# EAGLE board pixelAdapter_l432-Panel-v3.0 (EAGLE 9.6.2), part 1 of 5
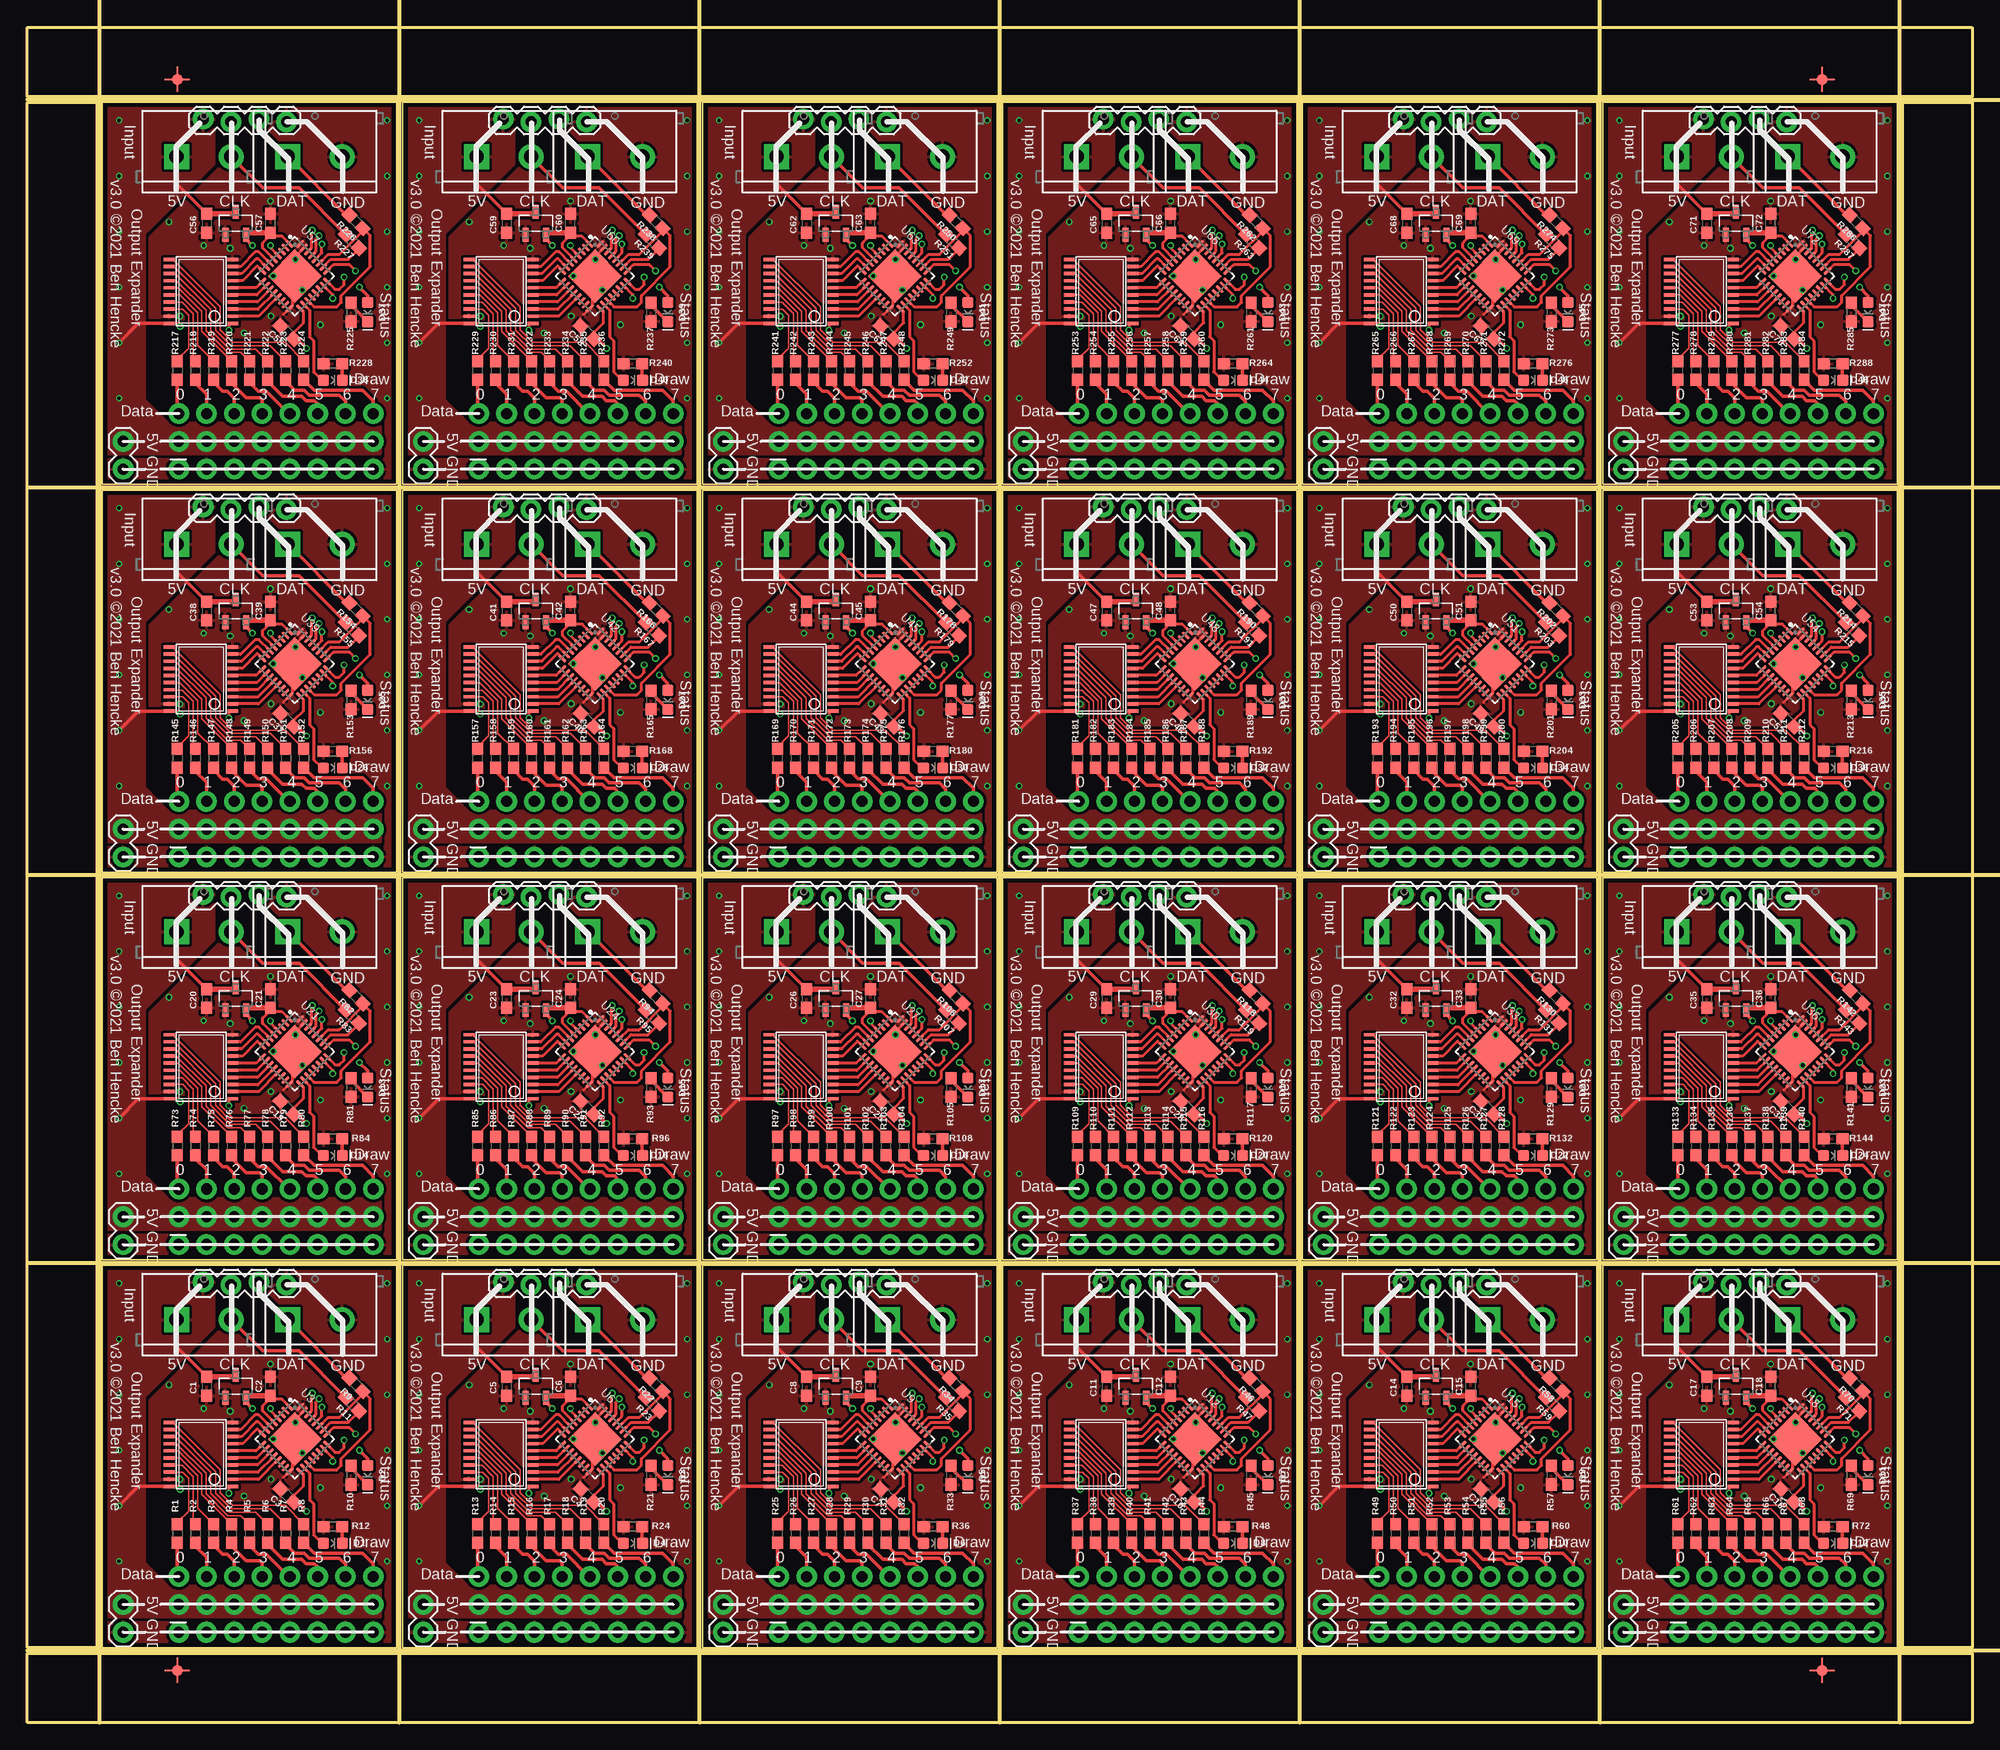
[diagram p0: board, top side]
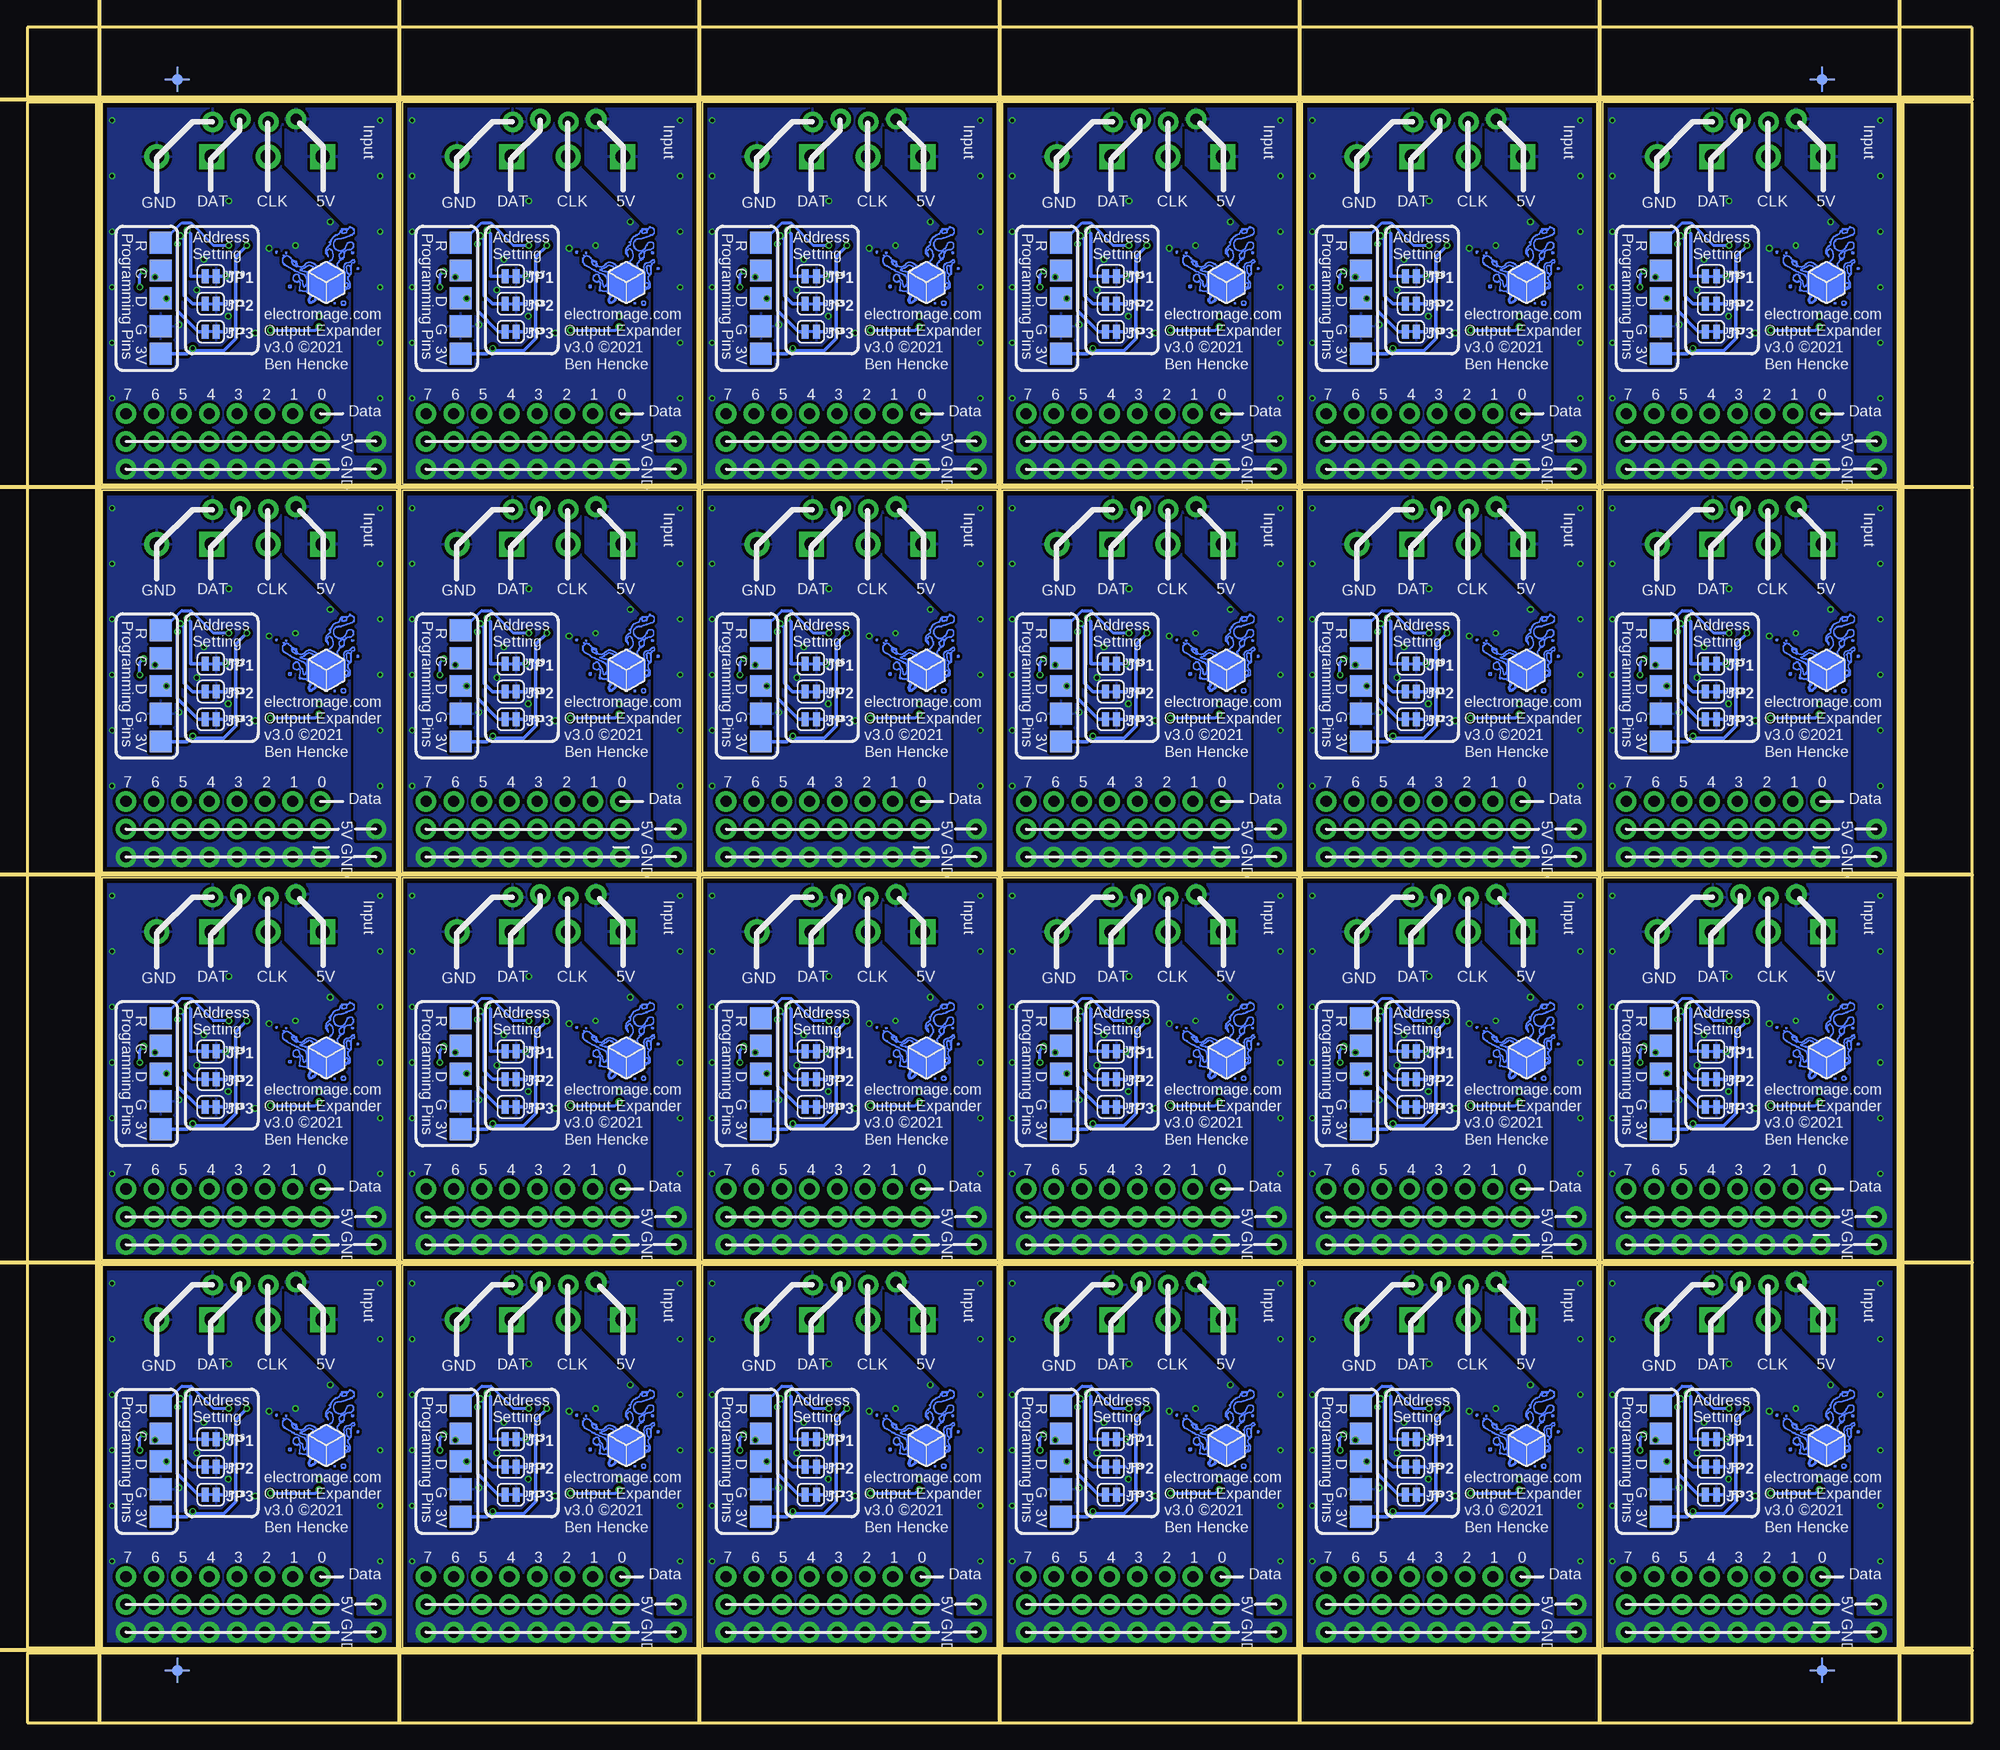
[diagram p1: board, bottom side, seen from below]

Size 177.8 x 154.94 mm. Coordinates in mm from the lower left corner, seen from the top.
Outline: 6.86,6.86 33.78,6.86 33.78,41.78 6.86,41.78 6.86,6.86
Outline: 34.29,6.86 61.21,6.86 61.21,41.78 34.29,41.78 34.29,6.86
Outline: 61.72,6.86 88.65,6.86 88.65,41.78 61.72,41.78 61.72,6.86
Outline: 89.15,6.86 116.08,6.86 116.08,41.78 89.15,41.78 89.15,6.86
Outline: 116.59,6.86 143.51,6.86 143.51,41.78 116.59,41.78 116.59,6.86
Outline: 144.02,6.86 170.94,6.86 170.94,41.78 144.02,41.78 144.02,6.86
Outline: 6.86,42.29 33.78,42.29 33.78,77.22 6.86,77.22 6.86,42.29
Outline: 34.29,42.29 61.21,42.29 61.21,77.22 34.29,77.22 34.29,42.29
Outline: 61.72,42.29 88.65,42.29 88.65,77.22 61.72,77.22 61.72,42.29
Outline: 89.15,42.29 116.08,42.29 116.08,77.22 89.15,77.22 89.15,42.29
Outline: 116.59,42.29 143.51,42.29 143.51,77.22 116.59,77.22 116.59,42.29
Outline: 144.02,42.29 170.94,42.29 170.94,77.22 144.02,77.22 144.02,42.29
Outline: 6.86,77.72 33.78,77.72 33.78,112.65 6.86,112.65 6.86,77.72
Outline: 34.29,77.72 61.21,77.72 61.21,112.65 34.29,112.65 34.29,77.72
Outline: 61.72,77.72 88.65,77.72 88.65,112.65 61.72,112.65 61.72,77.72
Outline: 89.15,77.72 116.08,77.72 116.08,112.65 89.15,112.65 89.15,77.72
Outline: 116.59,77.72 143.51,77.72 143.51,112.65 116.59,112.65 116.59,77.72
Outline: 144.02,77.72 170.94,77.72 170.94,112.65 144.02,112.65 144.02,77.72
Outline: 6.86,113.16 33.78,113.16 33.78,148.08 6.86,148.08 6.86,113.16
Outline: 34.29,113.16 61.21,113.16 61.21,148.08 34.29,148.08 34.29,113.16
Outline: 61.72,113.16 88.65,113.16 88.65,148.08 61.72,148.08 61.72,113.16
Outline: 89.15,113.16 116.08,113.16 116.08,148.08 89.15,148.08 89.15,113.16
Outline: 116.59,113.16 143.51,113.16 143.51,148.08 116.59,148.08 116.59,113.16
Outline: 144.02,113.16 170.94,113.16 170.94,148.08 144.02,148.08 144.02,113.16
Outline: 0,6.35 177.8,6.35 177.8,0 0,0 0,6.35
Outline: 171.45,148.08 177.8,148.08 177.8,6.86 171.45,6.86 171.45,148.08
Outline: 0,154.94 177.8,154.94 177.8,148.59 0,148.59 0,154.94
Outline: 0,148.08 6.35,148.08 6.35,6.86 0,6.86 0,148.08
Copper layers (1*16): Top 0.035559375mm / dielectric 1.6mm / Bottom 0.035559375mm
Design rules "oshpark-2layer-benmod *": minimum track width 6mil, minimum drill 10mil, track to track 6mil, track to pad 6mil, pad to pad 6mil, via to via 6mil, smd to smd 6mil, copper to edge 15mil, drill to drill 6mil, minimum pad ring 5mil, minimum via ring 5mil, stop-mask expansion 1mil, vias tented up to drill 20mil, thermal gap 10mil
Milling: 12 lines

## Footprints (pad centres in the part's own frame; a part is rotated, then mirrored left to right if it is on the bottom)
0603 = smd 1.1 x 1: 1 -0.85,0; 2 0.85,0
LED-0603 = smd 1 x 1: A -0.877,0; C 0.877,0
BENSFIDUCIAL-SMALL = smd 1 x 1: 1 0,0 | smd 0.152 x 0.762: P$1 0,0.762; P$2 0,-0.762 | smd 0.762 x 0.152: P$3 0.762,0; P$4 -0.762,0
1X08_NO_SILK = drill 1.016 pad 1.88: 1 0,0; 2 2.54,0; 3 5.08,0; 4 7.62,0; 5 10.16,0; 6 12.7,0; 7 15.24,0; 8 17.78,0
2X8-NOSILK = drill 1.016 pad 1.88: 1 0,0; 2 0,2.54; 3 2.54,0; 4 2.54,2.54; 5 5.08,0; 6 5.08,2.54; 7 7.62,0; 8 7.62,2.54; 9 10.16,0; 10 10.16,2.54; 11 12.7,0; 12 12.7,2.54; 13 15.24,0; 14 15.24,2.54; 15 17.78,0; 16 17.78,2.54
SCREWTERMINAL-5MM-2 = drill 1.3 pad 2.286 square: 1 0,0 | drill 1.3 pad 2.286: 2 5,0
1X04_LOCK = drill 1.016 pad 1.88: 1 0,0.127; 2 2.54,-0.127; 3 5.08,0.127; 4 7.62,-0.127
1X02 = drill 1.016 pad 1.88: 1 0,0; 2 2.54,0
SMT-JUMPER_2_NC_TRACE_SILK = smd 0.635 x 1.27: 1 -0.508,0; 2 0.508,0
TP20SQ = smd 2 x 2: TP 0,0
TSSOP20 = smd 0.305 x 0.991: 1 -2.925,-2.918; 2 -2.275,-2.918; 3 -1.625,-2.918; 4 -0.975,-2.918; 5 -0.325,-2.918; 6 0.325,-2.918; 7 0.975,-2.918; 8 1.625,-2.918; 9 2.275,-2.918; 10 2.925,-2.918; 11 2.925,2.918; 12 2.275,2.918; 13 1.625,2.918; 14 0.975,2.918; 15 0.325,2.918; 16 -0.325,2.918; 17 -0.975,2.918; 18 -1.625,2.918; 19 -2.275,2.918; 20 -2.925,2.918
SOT95P237X112-3N = smd 0.559 x 1.27: 1 -0.94,-1.041; 2 0.94,-1.041; 3 0,1.041
QFN50P500X500X60-33N = smd 0.86 x 0.25: 1 -2.435,1.75; 2 -2.435,1.25; 3 -2.435,0.75; 4 -2.435,0.25; 5 -2.435,-0.25; 6 -2.435,-0.75; 7 -2.435,-1.25; 8 -2.435,-1.75; 17 2.435,-1.75; 18 2.435,-1.25; 19 2.435,-0.75; 20 2.435,-0.25; 21 2.435,0.25; 22 2.435,0.75; 23 2.435,1.25; 24 2.435,1.75 | smd 0.25 x 0.86: 9 -1.75,-2.435; 10 -1.25,-2.435; 11 -0.75,-2.435; 12 -0.25,-2.435; 13 0.25,-2.435; 14 0.75,-2.435; 15 1.25,-2.435; 16 1.75,-2.435; 25 1.75,2.435; 26 1.25,2.435; 27 0.75,2.435; 28 0.25,2.435; 29 -0.25,2.435; 30 -0.75,2.435; 31 -1.25,2.435; 32 -1.75,2.435 | smd 3.45 x 3.45: 33 0,0

## Placement (x,y rotation side)
C1  4.7uF  [0603]  16.38,30.73 270 top
C2  4.7uF  [0603]  22.23,30.73 90 top
C3  0.1uF  [0603]  23.75,20.75 135 top
C4  0.1uF  [0603]  51.18,20.75 135 top
C5  4.7uF  [0603]  43.81,30.73 270 top
C6  4.7uF  [0603]  49.66,30.73 90 top
C7  0.1uF  [0603]  78.61,20.75 135 top
C8  4.7uF  [0603]  71.25,30.73 270 top
C9  4.7uF  [0603]  77.09,30.73 90 top
C10  0.1uF  [0603]  106.05,20.75 135 top
C11  4.7uF  [0603]  98.68,30.73 270 top
C12  4.7uF  [0603]  104.52,30.73 90 top
C13  0.1uF  [0603]  133.48,20.75 135 top
C14  4.7uF  [0603]  126.11,30.73 270 top
C15  4.7uF  [0603]  131.95,30.73 90 top
C16  0.1uF  [0603]  160.91,20.75 135 top
C17  4.7uF  [0603]  153.54,30.73 270 top
C18  4.7uF  [0603]  159.38,30.73 90 top
C19  0.1uF  [0603]  23.75,56.18 135 top
C20  4.7uF  [0603]  16.38,66.17 270 top
C21  4.7uF  [0603]  22.23,66.17 90 top
C22  0.1uF  [0603]  51.18,56.18 135 top
C23  4.7uF  [0603]  43.81,66.17 270 top
C24  4.7uF  [0603]  49.66,66.17 90 top
C25  0.1uF  [0603]  78.61,56.18 135 top
C26  4.7uF  [0603]  71.25,66.17 270 top
C27  4.7uF  [0603]  77.09,66.17 90 top
C28  0.1uF  [0603]  106.05,56.18 135 top
C29  4.7uF  [0603]  98.68,66.17 270 top
C30  4.7uF  [0603]  104.52,66.17 90 top
C31  0.1uF  [0603]  133.48,56.18 135 top
C32  4.7uF  [0603]  126.11,66.17 270 top
C33  4.7uF  [0603]  131.95,66.17 90 top
C34  0.1uF  [0603]  160.91,56.18 135 top
C35  4.7uF  [0603]  153.54,66.17 270 top
C36  4.7uF  [0603]  159.38,66.17 90 top
C37  0.1uF  [0603]  23.75,91.62 135 top
C38  4.7uF  [0603]  16.38,101.6 270 top
C39  4.7uF  [0603]  22.23,101.6 90 top
C40  0.1uF  [0603]  51.18,91.62 135 top
C41  4.7uF  [0603]  43.81,101.6 270 top
C42  4.7uF  [0603]  49.66,101.6 90 top
C43  0.1uF  [0603]  78.61,91.62 135 top
C44  4.7uF  [0603]  71.25,101.6 270 top
C45  4.7uF  [0603]  77.09,101.6 90 top
C46  0.1uF  [0603]  106.05,91.62 135 top
C47  4.7uF  [0603]  98.68,101.6 270 top
C48  4.7uF  [0603]  104.52,101.6 90 top
C49  0.1uF  [0603]  133.48,91.62 135 top
C50  4.7uF  [0603]  126.11,101.6 270 top
C51  4.7uF  [0603]  131.95,101.6 90 top
C52  0.1uF  [0603]  160.91,91.62 135 top
C53  4.7uF  [0603]  153.54,101.6 270 top
C54  4.7uF  [0603]  159.38,101.6 90 top
C55  0.1uF  [0603]  23.75,127.05 135 top
C56  4.7uF  [0603]  16.38,137.03 270 top
C57  4.7uF  [0603]  22.23,137.03 90 top
C58  0.1uF  [0603]  51.18,127.05 135 top
C59  4.7uF  [0603]  43.81,137.03 270 top
C60  4.7uF  [0603]  49.66,137.03 90 top
C61  0.1uF  [0603]  78.61,127.05 135 top
C62  4.7uF  [0603]  71.25,137.03 270 top
C63  4.7uF  [0603]  77.09,137.03 90 top
C64  0.1uF  [0603]  106.05,127.05 135 top
C65  4.7uF  [0603]  98.68,137.03 270 top
C66  4.7uF  [0603]  104.52,137.03 90 top
C67  0.1uF  [0603]  133.48,127.05 135 top
C68  4.7uF  [0603]  126.11,137.03 270 top
C69  4.7uF  [0603]  131.95,137.03 90 top
C70  0.1uF  [0603]  160.91,127.05 135 top
C71  4.7uF  [0603]  153.54,137.03 270 top
C72  4.7uF  [0603]  159.38,137.03 90 top
D1  GREEN  [LED-0603]  27.94,16.38 0 top
D2  ORANGE  [LED-0603]  31.12,22.61 270 top
D3  ORANGE  [LED-0603]  58.55,22.61 270 top
D4  GREEN  [LED-0603]  55.37,16.38 0 top
D5  ORANGE  [LED-0603]  85.98,22.61 270 top
D6  GREEN  [LED-0603]  82.8,16.38 0 top
D7  ORANGE  [LED-0603]  113.41,22.61 270 top
D8  GREEN  [LED-0603]  110.24,16.38 0 top
D9  ORANGE  [LED-0603]  140.84,22.61 270 top
D10  GREEN  [LED-0603]  137.67,16.38 0 top
D11  ORANGE  [LED-0603]  168.28,22.61 270 top
D12  GREEN  [LED-0603]  165.1,16.38 0 top
D13  ORANGE  [LED-0603]  31.12,58.04 270 top
D14  GREEN  [LED-0603]  27.94,51.82 0 top
D15  ORANGE  [LED-0603]  58.55,58.04 270 top
D16  GREEN  [LED-0603]  55.37,51.82 0 top
D17  ORANGE  [LED-0603]  85.98,58.04 270 top
D18  GREEN  [LED-0603]  82.8,51.82 0 top
D19  ORANGE  [LED-0603]  113.41,58.04 270 top
D20  GREEN  [LED-0603]  110.24,51.82 0 top
D21  ORANGE  [LED-0603]  140.84,58.04 270 top
D22  GREEN  [LED-0603]  137.67,51.82 0 top
D23  ORANGE  [LED-0603]  168.28,58.04 270 top
D24  GREEN  [LED-0603]  165.1,51.82 0 top
D25  ORANGE  [LED-0603]  31.12,93.47 270 top
D26  GREEN  [LED-0603]  27.94,87.25 0 top
D27  ORANGE  [LED-0603]  58.55,93.47 270 top
D28  GREEN  [LED-0603]  55.37,87.25 0 top
D29  ORANGE  [LED-0603]  85.98,93.47 270 top
D30  GREEN  [LED-0603]  82.8,87.25 0 top
D31  ORANGE  [LED-0603]  113.41,93.47 270 top
D32  GREEN  [LED-0603]  110.24,87.25 0 top
D33  ORANGE  [LED-0603]  140.84,93.47 270 top
D34  GREEN  [LED-0603]  137.67,87.25 0 top
D35  ORANGE  [LED-0603]  168.28,93.47 270 top
D36  GREEN  [LED-0603]  165.1,87.25 0 top
D37  ORANGE  [LED-0603]  31.12,128.91 270 top
D38  GREEN  [LED-0603]  27.94,122.68 0 top
D39  ORANGE  [LED-0603]  58.55,128.91 270 top
D40  GREEN  [LED-0603]  55.37,122.68 0 top
D41  ORANGE  [LED-0603]  85.98,128.91 270 top
D42  GREEN  [LED-0603]  82.8,122.68 0 top
D43  ORANGE  [LED-0603]  113.41,128.91 270 top
D44  GREEN  [LED-0603]  110.24,122.68 0 top
D45  ORANGE  [LED-0603]  140.84,128.91 270 top
D46  GREEN  [LED-0603]  137.67,122.68 0 top
D47  ORANGE  [LED-0603]  168.28,128.91 270 top
D48  GREEN  [LED-0603]  165.1,122.68 0 top
E$1  [BENSFIDUCIAL-SMALL]  13.72,150.18 0 top
E$2  [BENSFIDUCIAL-SMALL]  13.72,150.18 0 bottom
E$3  [BENSFIDUCIAL-SMALL]  164.08,150.18 0 top
E$4  [BENSFIDUCIAL-SMALL]  164.08,150.18 0 bottom
E$5  [BENSFIDUCIAL-SMALL]  13.72,4.76 0 top
E$6  [BENSFIDUCIAL-SMALL]  13.72,4.76 0 bottom
E$7  [BENSFIDUCIAL-SMALL]  164.08,4.76 0 top
E$8  [BENSFIDUCIAL-SMALL]  164.08,4.76 0 bottom
J1  [1X08_NO_SILK]  13.84,8.25 0 top
J2  [2X8-NOSILK]  13.84,10.79 0 top
J3  [SCREWTERMINAL-5MM-2]  13.64,36.83 0 top
J4  [SCREWTERMINAL-5MM-2]  23.8,36.83 0 top
J5  [1X04_LOCK]  23.7,40.13 180 top
J6  [1X02]  8.76,8.25 90 top
J7  [2X8-NOSILK]  41.27,10.79 0 top
J8  [SCREWTERMINAL-5MM-2]  41.07,36.83 0 top
J9  [SCREWTERMINAL-5MM-2]  51.23,36.83 0 top
J10  [1X04_LOCK]  51.13,40.13 180 top
J11  [1X08_NO_SILK]  41.27,8.25 0 top
J12  [1X02]  36.2,8.25 90 top
J13  [2X8-NOSILK]  68.71,10.79 0 top
J14  [SCREWTERMINAL-5MM-2]  68.5,36.83 0 top
J15  [SCREWTERMINAL-5MM-2]  78.66,36.83 0 top
J16  [1X04_LOCK]  78.56,40.13 180 top
J17  [1X08_NO_SILK]  68.71,8.25 0 top
J18  [1X02]  63.63,8.25 90 top
J19  [2X8-NOSILK]  96.14,10.79 0 top
J20  [SCREWTERMINAL-5MM-2]  95.93,36.83 0 top
J21  [SCREWTERMINAL-5MM-2]  106.09,36.83 0 top
J22  [1X04_LOCK]  105.99,40.13 180 top
J23  [1X08_NO_SILK]  96.14,8.25 0 top
J24  [1X02]  91.06,8.25 90 top
J25  [2X8-NOSILK]  123.57,10.79 0 top
J26  [SCREWTERMINAL-5MM-2]  123.36,36.83 0 top
J27  [SCREWTERMINAL-5MM-2]  133.52,36.83 0 top
J28  [1X04_LOCK]  133.42,40.13 180 top
J29  [1X08_NO_SILK]  123.57,8.25 0 top
J30  [1X02]  118.49,8.25 90 top
J31  [2X8-NOSILK]  151,10.79 0 top
J32  [SCREWTERMINAL-5MM-2]  150.8,36.83 0 top
J33  [SCREWTERMINAL-5MM-2]  160.96,36.83 0 top
J34  [1X04_LOCK]  160.86,40.13 180 top
J35  [1X08_NO_SILK]  151,8.25 0 top
J36  [1X02]  145.92,8.25 90 top
J37  [2X8-NOSILK]  13.84,46.23 0 top
J38  [SCREWTERMINAL-5MM-2]  13.64,72.26 0 top
J39  [SCREWTERMINAL-5MM-2]  23.8,72.26 0 top
J40  [1X04_LOCK]  23.7,75.56 180 top
J41  [1X08_NO_SILK]  13.84,43.69 0 top
J42  [1X02]  8.76,43.69 90 top
J43  [2X8-NOSILK]  41.27,46.23 0 top
J44  [SCREWTERMINAL-5MM-2]  41.07,72.26 0 top
J45  [SCREWTERMINAL-5MM-2]  51.23,72.26 0 top
J46  [1X04_LOCK]  51.13,75.56 180 top
J47  [1X08_NO_SILK]  41.27,43.69 0 top
J48  [1X02]  36.2,43.69 90 top
J49  [2X8-NOSILK]  68.71,46.23 0 top
J50  [SCREWTERMINAL-5MM-2]  68.5,72.26 0 top
J51  [SCREWTERMINAL-5MM-2]  78.66,72.26 0 top
J52  [1X04_LOCK]  78.56,75.56 180 top
J53  [1X08_NO_SILK]  68.71,43.69 0 top
J54  [1X02]  63.63,43.69 90 top
J55  [2X8-NOSILK]  96.14,46.23 0 top
J56  [SCREWTERMINAL-5MM-2]  95.93,72.26 0 top
J57  [SCREWTERMINAL-5MM-2]  106.09,72.26 0 top
J58  [1X04_LOCK]  105.99,75.56 180 top
J59  [1X08_NO_SILK]  96.14,43.69 0 top
J60  [1X02]  91.06,43.69 90 top
J61  [2X8-NOSILK]  123.57,46.23 0 top
J62  [SCREWTERMINAL-5MM-2]  123.36,72.26 0 top
J63  [SCREWTERMINAL-5MM-2]  133.52,72.26 0 top
J64  [1X04_LOCK]  133.42,75.56 180 top
J65  [1X08_NO_SILK]  123.57,43.69 0 top
J66  [1X02]  118.49,43.69 90 top
J67  [2X8-NOSILK]  151,46.23 0 top
J68  [SCREWTERMINAL-5MM-2]  150.8,72.26 0 top
J69  [SCREWTERMINAL-5MM-2]  160.96,72.26 0 top
J70  [1X04_LOCK]  160.86,75.56 180 top
J71  [1X08_NO_SILK]  151,43.69 0 top
J72  [1X02]  145.92,43.69 90 top
J73  [2X8-NOSILK]  13.84,81.66 0 top
J74  [SCREWTERMINAL-5MM-2]  13.64,107.7 0 top
J75  [SCREWTERMINAL-5MM-2]  23.8,107.7 0 top
J76  [1X04_LOCK]  23.7,111 180 top
J77  [1X08_NO_SILK]  13.84,79.12 0 top
J78  [1X02]  8.76,79.12 90 top
J79  [2X8-NOSILK]  41.27,81.66 0 top
J80  [SCREWTERMINAL-5MM-2]  41.07,107.7 0 top
J81  [SCREWTERMINAL-5MM-2]  51.23,107.7 0 top
J82  [1X04_LOCK]  51.13,111 180 top
J83  [1X08_NO_SILK]  41.27,79.12 0 top
J84  [1X02]  36.2,79.12 90 top
J85  [2X8-NOSILK]  68.71,81.66 0 top
J86  [SCREWTERMINAL-5MM-2]  68.5,107.7 0 top
J87  [SCREWTERMINAL-5MM-2]  78.66,107.7 0 top
J88  [1X04_LOCK]  78.56,111 180 top
J89  [1X08_NO_SILK]  68.71,79.12 0 top
J90  [1X02]  63.63,79.12 90 top
J91  [2X8-NOSILK]  96.14,81.66 0 top
J92  [SCREWTERMINAL-5MM-2]  95.93,107.7 0 top
J93  [SCREWTERMINAL-5MM-2]  106.09,107.7 0 top
J94  [1X04_LOCK]  105.99,111 180 top
J95  [1X08_NO_SILK]  96.14,79.12 0 top
J96  [1X02]  91.06,79.12 90 top
J97  [2X8-NOSILK]  123.57,81.66 0 top
J98  [SCREWTERMINAL-5MM-2]  123.36,107.7 0 top
J99  [SCREWTERMINAL-5MM-2]  133.52,107.7 0 top
J100  [1X04_LOCK]  133.42,111 180 top
J101  [1X08_NO_SILK]  123.57,79.12 0 top
J102  [1X02]  118.49,79.12 90 top
J103  [2X8-NOSILK]  151,81.66 0 top
J104  [SCREWTERMINAL-5MM-2]  150.8,107.7 0 top
J105  [SCREWTERMINAL-5MM-2]  160.96,107.7 0 top
J106  [1X04_LOCK]  160.86,111 180 top
J107  [1X08_NO_SILK]  151,79.12 0 top
J108  [1X02]  145.92,79.12 90 top
J109  [2X8-NOSILK]  13.84,117.09 0 top
J110  [SCREWTERMINAL-5MM-2]  13.64,143.13 0 top
J111  [SCREWTERMINAL-5MM-2]  23.8,143.13 0 top
J112  [1X04_LOCK]  23.7,146.43 180 top
J113  [1X08_NO_SILK]  13.84,114.55 0 top
J114  [1X02]  8.76,114.55 90 top
J115  [2X8-NOSILK]  41.27,117.09 0 top
J116  [SCREWTERMINAL-5MM-2]  41.07,143.13 0 top
J117  [SCREWTERMINAL-5MM-2]  51.23,143.13 0 top
J118  [1X04_LOCK]  51.13,146.43 180 top
J119  [1X08_NO_SILK]  41.27,114.55 0 top
J120  [1X02]  36.2,114.55 90 top
J121  [2X8-NOSILK]  68.71,117.09 0 top
J122  [SCREWTERMINAL-5MM-2]  68.5,143.13 0 top
J123  [SCREWTERMINAL-5MM-2]  78.66,143.13 0 top
J124  [1X04_LOCK]  78.56,146.43 180 top
J125  [1X08_NO_SILK]  68.71,114.55 0 top
J126  [1X02]  63.63,114.55 90 top
J127  [2X8-NOSILK]  96.14,117.09 0 top
J128  [SCREWTERMINAL-5MM-2]  95.93,143.13 0 top
J129  [SCREWTERMINAL-5MM-2]  106.09,143.13 0 top
J130  [1X04_LOCK]  105.99,146.43 180 top
J131  [1X08_NO_SILK]  96.14,114.55 0 top
J132  [1X02]  91.06,114.55 90 top
J133  [2X8-NOSILK]  123.57,117.09 0 top
J134  [SCREWTERMINAL-5MM-2]  123.36,143.13 0 top
J135  [SCREWTERMINAL-5MM-2]  133.52,143.13 0 top
J136  [1X04_LOCK]  133.42,146.43 180 top
J137  [1X08_NO_SILK]  123.57,114.55 0 top
J138  [1X02]  118.49,114.55 90 top
J139  [2X8-NOSILK]  151,117.09 0 top
J140  [SCREWTERMINAL-5MM-2]  150.8,143.13 0 top
J141  [SCREWTERMINAL-5MM-2]  160.96,143.13 0 top
J142  [1X04_LOCK]  160.86,146.43 180 top
J143  [1X08_NO_SILK]  151,114.55 0 top
J144  [1X02]  145.92,114.55 90 top
JP1  JUMPER-SMT_2_NC_TRACE_SILK  [SMT-JUMPER_2_NC_TRACE_SILK]  23.88,25.91 0 bottom
JP2  JUMPER-SMT_2_NC_TRACE_SILK  [SMT-JUMPER_2_NC_TRACE_SILK]  23.88,23.37 0 bottom
JP3  JUMPER-SMT_2_NC_TRACE_SILK  [SMT-JUMPER_2_NC_TRACE_SILK]  23.88,20.83 180 bottom
JP4  JUMPER-SMT_2_NC_TRACE_SILK  [SMT-JUMPER_2_NC_TRACE_SILK]  51.31,25.91 0 bottom
JP5  JUMPER-SMT_2_NC_TRACE_SILK  [SMT-JUMPER_2_NC_TRACE_SILK]  51.31,23.37 0 bottom
JP6  JUMPER-SMT_2_NC_TRACE_SILK  [SMT-JUMPER_2_NC_TRACE_SILK]  51.31,20.83 180 bottom
JP7  JUMPER-SMT_2_NC_TRACE_SILK  [SMT-JUMPER_2_NC_TRACE_SILK]  78.74,25.91 0 bottom
JP8  JUMPER-SMT_2_NC_TRACE_SILK  [SMT-JUMPER_2_NC_TRACE_SILK]  78.74,23.37 0 bottom
JP9  JUMPER-SMT_2_NC_TRACE_SILK  [SMT-JUMPER_2_NC_TRACE_SILK]  78.74,20.83 180 bottom
JP10  JUMPER-SMT_2_NC_TRACE_SILK  [SMT-JUMPER_2_NC_TRACE_SILK]  106.17,25.91 0 bottom
JP11  JUMPER-SMT_2_NC_TRACE_SILK  [SMT-JUMPER_2_NC_TRACE_SILK]  106.17,23.37 0 bottom
JP12  JUMPER-SMT_2_NC_TRACE_SILK  [SMT-JUMPER_2_NC_TRACE_SILK]  106.17,20.83 180 bottom
JP13  JUMPER-SMT_2_NC_TRACE_SILK  [SMT-JUMPER_2_NC_TRACE_SILK]  133.6,25.91 0 bottom
JP14  JUMPER-SMT_2_NC_TRACE_SILK  [SMT-JUMPER_2_NC_TRACE_SILK]  133.6,23.37 0 bottom
JP15  JUMPER-SMT_2_NC_TRACE_SILK  [SMT-JUMPER_2_NC_TRACE_SILK]  133.6,20.83 180 bottom
JP16  JUMPER-SMT_2_NC_TRACE_SILK  [SMT-JUMPER_2_NC_TRACE_SILK]  161.04,25.91 0 bottom
JP17  JUMPER-SMT_2_NC_TRACE_SILK  [SMT-JUMPER_2_NC_TRACE_SILK]  161.04,23.37 0 bottom
JP18  JUMPER-SMT_2_NC_TRACE_SILK  [SMT-JUMPER_2_NC_TRACE_SILK]  161.04,20.83 180 bottom
JP19  JUMPER-SMT_2_NC_TRACE_SILK  [SMT-JUMPER_2_NC_TRACE_SILK]  23.88,61.34 0 bottom
JP20  JUMPER-SMT_2_NC_TRACE_SILK  [SMT-JUMPER_2_NC_TRACE_SILK]  23.88,58.8 0 bottom
JP21  JUMPER-SMT_2_NC_TRACE_SILK  [SMT-JUMPER_2_NC_TRACE_SILK]  23.88,56.26 180 bottom
JP22  JUMPER-SMT_2_NC_TRACE_SILK  [SMT-JUMPER_2_NC_TRACE_SILK]  51.31,61.34 0 bottom
JP23  JUMPER-SMT_2_NC_TRACE_SILK  [SMT-JUMPER_2_NC_TRACE_SILK]  51.31,58.8 0 bottom
JP24  JUMPER-SMT_2_NC_TRACE_SILK  [SMT-JUMPER_2_NC_TRACE_SILK]  51.31,56.26 180 bottom
JP25  JUMPER-SMT_2_NC_TRACE_SILK  [SMT-JUMPER_2_NC_TRACE_SILK]  78.74,61.34 0 bottom
JP26  JUMPER-SMT_2_NC_TRACE_SILK  [SMT-JUMPER_2_NC_TRACE_SILK]  78.74,58.8 0 bottom
JP27  JUMPER-SMT_2_NC_TRACE_SILK  [SMT-JUMPER_2_NC_TRACE_SILK]  78.74,56.26 180 bottom
JP28  JUMPER-SMT_2_NC_TRACE_SILK  [SMT-JUMPER_2_NC_TRACE_SILK]  106.17,61.34 0 bottom
JP29  JUMPER-SMT_2_NC_TRACE_SILK  [SMT-JUMPER_2_NC_TRACE_SILK]  106.17,58.8 0 bottom
JP30  JUMPER-SMT_2_NC_TRACE_SILK  [SMT-JUMPER_2_NC_TRACE_SILK]  106.17,56.26 180 bottom
JP31  JUMPER-SMT_2_NC_TRACE_SILK  [SMT-JUMPER_2_NC_TRACE_SILK]  133.6,61.34 0 bottom
JP32  JUMPER-SMT_2_NC_TRACE_SILK  [SMT-JUMPER_2_NC_TRACE_SILK]  133.6,58.8 0 bottom
JP33  JUMPER-SMT_2_NC_TRACE_SILK  [SMT-JUMPER_2_NC_TRACE_SILK]  133.6,56.26 180 bottom
JP34  JUMPER-SMT_2_NC_TRACE_SILK  [SMT-JUMPER_2_NC_TRACE_SILK]  161.04,61.34 0 bottom
JP35  JUMPER-SMT_2_NC_TRACE_SILK  [SMT-JUMPER_2_NC_TRACE_SILK]  161.04,58.8 0 bottom
JP36  JUMPER-SMT_2_NC_TRACE_SILK  [SMT-JUMPER_2_NC_TRACE_SILK]  161.04,56.26 180 bottom
JP37  JUMPER-SMT_2_NC_TRACE_SILK  [SMT-JUMPER_2_NC_TRACE_SILK]  23.88,96.77 0 bottom
JP38  JUMPER-SMT_2_NC_TRACE_SILK  [SMT-JUMPER_2_NC_TRACE_SILK]  23.88,94.23 0 bottom
JP39  JUMPER-SMT_2_NC_TRACE_SILK  [SMT-JUMPER_2_NC_TRACE_SILK]  23.88,91.69 180 bottom
JP40  JUMPER-SMT_2_NC_TRACE_SILK  [SMT-JUMPER_2_NC_TRACE_SILK]  51.31,96.77 0 bottom
JP41  JUMPER-SMT_2_NC_TRACE_SILK  [SMT-JUMPER_2_NC_TRACE_SILK]  51.31,94.23 0 bottom
JP42  JUMPER-SMT_2_NC_TRACE_SILK  [SMT-JUMPER_2_NC_TRACE_SILK]  51.31,91.69 180 bottom
JP43  JUMPER-SMT_2_NC_TRACE_SILK  [SMT-JUMPER_2_NC_TRACE_SILK]  78.74,96.77 0 bottom
JP44  JUMPER-SMT_2_NC_TRACE_SILK  [SMT-JUMPER_2_NC_TRACE_SILK]  78.74,94.23 0 bottom
JP45  JUMPER-SMT_2_NC_TRACE_SILK  [SMT-JUMPER_2_NC_TRACE_SILK]  78.74,91.69 180 bottom
JP46  JUMPER-SMT_2_NC_TRACE_SILK  [SMT-JUMPER_2_NC_TRACE_SILK]  106.17,96.77 0 bottom
JP47  JUMPER-SMT_2_NC_TRACE_SILK  [SMT-JUMPER_2_NC_TRACE_SILK]  106.17,94.23 0 bottom
JP48  JUMPER-SMT_2_NC_TRACE_SILK  [SMT-JUMPER_2_NC_TRACE_SILK]  106.17,91.69 180 bottom
JP49  JUMPER-SMT_2_NC_TRACE_SILK  [SMT-JUMPER_2_NC_TRACE_SILK]  133.6,96.77 0 bottom
JP50  JUMPER-SMT_2_NC_TRACE_SILK  [SMT-JUMPER_2_NC_TRACE_SILK]  133.6,94.23 0 bottom
JP51  JUMPER-SMT_2_NC_TRACE_SILK  [SMT-JUMPER_2_NC_TRACE_SILK]  133.6,91.69 180 bottom
JP52  JUMPER-SMT_2_NC_TRACE_SILK  [SMT-JUMPER_2_NC_TRACE_SILK]  161.04,96.77 0 bottom
JP53  JUMPER-SMT_2_NC_TRACE_SILK  [SMT-JUMPER_2_NC_TRACE_SILK]  161.04,94.23 0 bottom
JP54  JUMPER-SMT_2_NC_TRACE_SILK  [SMT-JUMPER_2_NC_TRACE_SILK]  161.04,91.69 180 bottom
JP55  JUMPER-SMT_2_NC_TRACE_SILK  [SMT-JUMPER_2_NC_TRACE_SILK]  23.88,132.21 0 bottom
JP56  JUMPER-SMT_2_NC_TRACE_SILK  [SMT-JUMPER_2_NC_TRACE_SILK]  23.88,129.67 0 bottom
JP57  JUMPER-SMT_2_NC_TRACE_SILK  [SMT-JUMPER_2_NC_TRACE_SILK]  23.88,127.13 180 bottom
JP58  JUMPER-SMT_2_NC_TRACE_SILK  [SMT-JUMPER_2_NC_TRACE_SILK]  51.31,132.21 0 bottom
JP59  JUMPER-SMT_2_NC_TRACE_SILK  [SMT-JUMPER_2_NC_TRACE_SILK]  51.31,129.67 0 bottom
JP60  JUMPER-SMT_2_NC_TRACE_SILK  [SMT-JUMPER_2_NC_TRACE_SILK]  51.31,127.13 180 bottom
JP61  JUMPER-SMT_2_NC_TRACE_SILK  [SMT-JUMPER_2_NC_TRACE_SILK]  78.74,132.21 0 bottom
JP62  JUMPER-SMT_2_NC_TRACE_SILK  [SMT-JUMPER_2_NC_TRACE_SILK]  78.74,129.67 0 bottom
JP63  JUMPER-SMT_2_NC_TRACE_SILK  [SMT-JUMPER_2_NC_TRACE_SILK]  78.74,127.13 180 bottom
JP64  JUMPER-SMT_2_NC_TRACE_SILK  [SMT-JUMPER_2_NC_TRACE_SILK]  106.17,132.21 0 bottom
JP65  JUMPER-SMT_2_NC_TRACE_SILK  [SMT-JUMPER_2_NC_TRACE_SILK]  106.17,129.67 0 bottom
JP66  JUMPER-SMT_2_NC_TRACE_SILK  [SMT-JUMPER_2_NC_TRACE_SILK]  106.17,127.13 180 bottom
JP67  JUMPER-SMT_2_NC_TRACE_SILK  [SMT-JUMPER_2_NC_TRACE_SILK]  133.6,132.21 0 bottom
JP68  JUMPER-SMT_2_NC_TRACE_SILK  [SMT-JUMPER_2_NC_TRACE_SILK]  133.6,129.67 0 bottom
JP69  JUMPER-SMT_2_NC_TRACE_SILK  [SMT-JUMPER_2_NC_TRACE_SILK]  133.6,127.13 180 bottom
JP70  JUMPER-SMT_2_NC_TRACE_SILK  [SMT-JUMPER_2_NC_TRACE_SILK]  161.04,132.21 0 bottom
JP71  JUMPER-SMT_2_NC_TRACE_SILK  [SMT-JUMPER_2_NC_TRACE_SILK]  161.04,129.67 0 bottom
JP72  JUMPER-SMT_2_NC_TRACE_SILK  [SMT-JUMPER_2_NC_TRACE_SILK]  161.04,127.13 180 bottom
R1  100  [0603]  13.72,17.27 270 top
R2  100  [0603]  15.37,17.27 270 top
R3  100  [0603]  17.02,17.27 270 top
R4  100  [0603]  18.67,17.27 270 top
R5  100  [0603]  20.32,17.27 270 top
R6  100  [0603]  21.97,17.27 270 top
R7  100  [0603]  23.62,17.27 270 top
R8  100  [0603]  25.27,17.27 270 top
R9  100  [0603]  30.05,30.89 315 top
R10  100  [0603]  29.59,22.61 270 top
R11  100  [0603]  29.72,29.08 135 top
R12  100  [0603]  27.94,17.91 180 top
R13  100  [0603]  41.15,17.27 270 top
R14  100  [0603]  42.8,17.27 270 top
R15  100  [0603]  44.45,17.27 270 top
R16  100  [0603]  46.1,17.27 270 top
R17  100  [0603]  47.75,17.27 270 top
R18  100  [0603]  49.4,17.27 270 top
R19  100  [0603]  51.05,17.27 270 top
R20  100  [0603]  52.7,17.27 270 top
R21  100  [0603]  57.02,22.61 270 top
R22  100  [0603]  57.48,30.89 315 top
R23  100  [0603]  57.15,29.08 135 top
R24  100  [0603]  55.37,17.91 180 top
R25  100  [0603]  68.58,17.27 270 top
R26  100  [0603]  70.23,17.27 270 top
R27  100  [0603]  71.88,17.27 270 top
R28  100  [0603]  73.53,17.27 270 top
R29  100  [0603]  75.18,17.27 270 top
R30  100  [0603]  76.84,17.27 270 top
R31  100  [0603]  78.49,17.27 270 top
R32  100  [0603]  80.14,17.27 270 top
R33  100  [0603]  84.45,22.61 270 top
R34  100  [0603]  84.91,30.89 315 top
R35  100  [0603]  84.58,29.08 135 top
R36  100  [0603]  82.8,17.91 180 top
R37  100  [0603]  96.01,17.27 270 top
R38  100  [0603]  97.66,17.27 270 top
R39  100  [0603]  99.31,17.27 270 top
R40  100  [0603]  100.97,17.27 270 top
R41  100  [0603]  102.62,17.27 270 top
R42  100  [0603]  104.27,17.27 270 top
R43  100  [0603]  105.92,17.27 270 top
R44  100  [0603]  107.57,17.27 270 top
R45  100  [0603]  111.89,22.61 270 top
R46  100  [0603]  112.34,30.89 315 top
R47  100  [0603]  112.01,29.08 135 top
R48  100  [0603]  110.24,17.91 180 top
R49  100  [0603]  123.44,17.27 270 top
R50  100  [0603]  125.09,17.27 270 top
R51  100  [0603]  126.75,17.27 270 top
R52  100  [0603]  128.4,17.27 270 top
R53  100  [0603]  130.05,17.27 270 top
R54  100  [0603]  131.7,17.27 270 top
R55  100  [0603]  133.35,17.27 270 top
R56  100  [0603]  135,17.27 270 top
R57  100  [0603]  139.32,22.61 270 top
R58  100  [0603]  139.78,30.89 315 top
R59  100  [0603]  139.45,29.08 135 top
R60  100  [0603]  137.67,17.91 180 top
R61  100  [0603]  150.88,17.27 270 top
R62  100  [0603]  152.53,17.27 270 top
R63  100  [0603]  154.18,17.27 270 top
R64  100  [0603]  155.83,17.27 270 top
R65  100  [0603]  157.48,17.27 270 top
R66  100  [0603]  159.13,17.27 270 top
R67  100  [0603]  160.78,17.27 270 top
R68  100  [0603]  162.43,17.27 270 top
R69  100  [0603]  166.75,22.61 270 top
R70  100  [0603]  167.21,30.89 315 top
R71  100  [0603]  166.88,29.08 135 top
R72  100  [0603]  165.1,17.91 180 top
R73  100  [0603]  13.72,52.7 270 top
R74  100  [0603]  15.37,52.7 270 top
R75  100  [0603]  17.02,52.7 270 top
R76  100  [0603]  18.67,52.7 270 top
R77  100  [0603]  20.32,52.7 270 top
R78  100  [0603]  21.97,52.7 270 top
R79  100  [0603]  23.62,52.7 270 top
R80  100  [0603]  25.27,52.7 270 top
R81  100  [0603]  29.59,58.04 270 top
R82  100  [0603]  30.05,66.32 315 top
R83  100  [0603]  29.72,64.52 135 top
R84  100  [0603]  27.94,53.34 180 top
R85  100  [0603]  41.15,52.7 270 top
R86  100  [0603]  42.8,52.7 270 top
R87  100  [0603]  44.45,52.7 270 top
R88  100  [0603]  46.1,52.7 270 top
R89  100  [0603]  47.75,52.7 270 top
R90  100  [0603]  49.4,52.7 270 top
R91  100  [0603]  51.05,52.7 270 top
R92  100  [0603]  52.7,52.7 270 top
R93  100  [0603]  57.02,58.04 270 top
R94  100  [0603]  57.48,66.32 315 top
R95  100  [0603]  57.15,64.52 135 top
R96  100  [0603]  55.37,53.34 180 top
R97  100  [0603]  68.58,52.7 270 top
R98  100  [0603]  70.23,52.7 270 top
R99  100  [0603]  71.88,52.7 270 top
R100  100  [0603]  73.53,52.7 270 top
R101  100  [0603]  75.18,52.7 270 top
R102  100  [0603]  76.84,52.7 270 top
R103  100  [0603]  78.49,52.7 270 top
R104  100  [0603]  80.14,52.7 270 top
R105  100  [0603]  84.45,58.04 270 top
R106  100  [0603]  84.91,66.32 315 top
R107  100  [0603]  84.58,64.52 135 top
R108  100  [0603]  82.8,53.34 180 top
R109  100  [0603]  96.01,52.7 270 top
R110  100  [0603]  97.66,52.7 270 top
R111  100  [0603]  99.31,52.7 270 top
R112  100  [0603]  100.97,52.7 270 top
R113  100  [0603]  102.62,52.7 270 top
R114  100  [0603]  104.27,52.7 270 top
R115  100  [0603]  105.92,52.7 270 top
R116  100  [0603]  107.57,52.7 270 top
R117  100  [0603]  111.89,58.04 270 top
R118  100  [0603]  112.34,66.32 315 top
R119  100  [0603]  112.01,64.52 135 top
R120  100  [0603]  110.24,53.34 180 top
R121  100  [0603]  123.44,52.7 270 top
R122  100  [0603]  125.09,52.7 270 top
R123  100  [0603]  126.75,52.7 270 top
R124  100  [0603]  128.4,52.7 270 top
R125  100  [0603]  130.05,52.7 270 top
R126  100  [0603]  131.7,52.7 270 top
R127  100  [0603]  133.35,52.7 270 top
R128  100  [0603]  135,52.7 270 top
R129  100  [0603]  139.32,58.04 270 top
R130  100  [0603]  139.78,66.32 315 top
R131  100  [0603]  139.45,64.52 135 top
R132  100  [0603]  137.67,53.34 180 top
R133  100  [0603]  150.88,52.7 270 top
R134  100  [0603]  152.53,52.7 270 top
R135  100  [0603]  154.18,52.7 270 top
R136  100  [0603]  155.83,52.7 270 top
R137  100  [0603]  157.48,52.7 270 top
R138  100  [0603]  159.13,52.7 270 top
R139  100  [0603]  160.78,52.7 270 top
R140  100  [0603]  162.43,52.7 270 top
R141  100  [0603]  166.75,58.04 270 top
R142  100  [0603]  167.21,66.32 315 top
R143  100  [0603]  166.88,64.52 135 top
R144  100  [0603]  165.1,53.34 180 top
R145  100  [0603]  13.72,88.14 270 top
R146  100  [0603]  15.37,88.14 270 top
R147  100  [0603]  17.02,88.14 270 top
R148  100  [0603]  18.67,88.14 270 top
R149  100  [0603]  20.32,88.14 270 top
R150  100  [0603]  21.97,88.14 270 top
R151  100  [0603]  23.62,88.14 270 top
R152  100  [0603]  25.27,88.14 270 top
R153  100  [0603]  29.59,93.47 270 top
R154  100  [0603]  30.05,101.75 315 top
R155  100  [0603]  29.72,99.95 135 top
R156  100  [0603]  27.94,88.77 180 top
R157  100  [0603]  41.15,88.14 270 top
R158  100  [0603]  42.8,88.14 270 top
R159  100  [0603]  44.45,88.14 270 top
R160  100  [0603]  46.1,88.14 270 top
R161  100  [0603]  47.75,88.14 270 top
R162  100  [0603]  49.4,88.14 270 top
R163  100  [0603]  51.05,88.14 270 top
R164  100  [0603]  52.7,88.14 270 top
R165  100  [0603]  57.02,93.47 270 top
R166  100  [0603]  57.48,101.75 315 top
R167  100  [0603]  57.15,99.95 135 top
R168  100  [0603]  55.37,88.77 180 top
R169  100  [0603]  68.58,88.14 270 top
R170  100  [0603]  70.23,88.14 270 top
R171  100  [0603]  71.88,88.14 270 top
R172  100  [0603]  73.53,88.14 270 top
R173  100  [0603]  75.18,88.14 270 top
R174  100  [0603]  76.84,88.14 270 top
R175  100  [0603]  78.49,88.14 270 top
R176  100  [0603]  80.14,88.14 270 top
R177  100  [0603]  84.45,93.47 270 top
R178  100  [0603]  84.91,101.75 315 top
R179  100  [0603]  84.58,99.95 135 top
R180  100  [0603]  82.8,88.77 180 top
R181  100  [0603]  96.01,88.14 270 top
R182  100  [0603]  97.66,88.14 270 top
R183  100  [0603]  99.31,88.14 270 top
R184  100  [0603]  100.97,88.14 270 top
R185  100  [0603]  102.62,88.14 270 top
R186  100  [0603]  104.27,88.14 270 top
R187  100  [0603]  105.92,88.14 270 top
R188  100  [0603]  107.57,88.14 270 top
R189  100  [0603]  111.89,93.47 270 top
R190  100  [0603]  112.34,101.75 315 top
R191  100  [0603]  112.01,99.95 135 top
R192  100  [0603]  110.24,88.77 180 top
R193  100  [0603]  123.44,88.14 270 top
R194  100  [0603]  125.09,88.14 270 top
R195  100  [0603]  126.75,88.14 270 top
R196  100  [0603]  128.4,88.14 270 top
R197  100  [0603]  130.05,88.14 270 top
R198  100  [0603]  131.7,88.14 270 top
R199  100  [0603]  133.35,88.14 270 top
R200  100  [0603]  135,88.14 270 top
R201  100  [0603]  139.32,93.47 270 top
R202  100  [0603]  139.78,101.75 315 top
R203  100  [0603]  139.45,99.95 135 top
R204  100  [0603]  137.67,88.77 180 top
R205  100  [0603]  150.88,88.14 270 top
R206  100  [0603]  152.53,88.14 270 top
R207  100  [0603]  154.18,88.14 270 top
R208  100  [0603]  155.83,88.14 270 top
R209  100  [0603]  157.48,88.14 270 top
R210  100  [0603]  159.13,88.14 270 top
R211  100  [0603]  160.78,88.14 270 top
R212  100  [0603]  162.43,88.14 270 top
R213  100  [0603]  166.75,93.47 270 top
R214  100  [0603]  167.21,101.75 315 top
R215  100  [0603]  166.88,99.95 135 top
R216  100  [0603]  165.1,88.77 180 top
R217  100  [0603]  13.72,123.57 270 top
R218  100  [0603]  15.37,123.57 270 top
R219  100  [0603]  17.02,123.57 270 top
R220  100  [0603]  18.67,123.57 270 top
R221  100  [0603]  20.32,123.57 270 top
R222  100  [0603]  21.97,123.57 270 top
R223  100  [0603]  23.62,123.57 270 top
R224  100  [0603]  25.27,123.57 270 top
R225  100  [0603]  29.59,128.91 270 top
R226  100  [0603]  30.05,137.19 315 top
R227  100  [0603]  29.72,135.38 135 top
R228  100  [0603]  27.94,124.21 180 top
R229  100  [0603]  41.15,123.57 270 top
R230  100  [0603]  42.8,123.57 270 top
R231  100  [0603]  44.45,123.57 270 top
R232  100  [0603]  46.1,123.57 270 top
R233  100  [0603]  47.75,123.57 270 top
R234  100  [0603]  49.4,123.57 270 top
R235  100  [0603]  51.05,123.57 270 top
R236  100  [0603]  52.7,123.57 270 top
R237  100  [0603]  57.02,128.91 270 top
R238  100  [0603]  57.48,137.19 315 top
R239  100  [0603]  57.15,135.38 135 top
R240  100  [0603]  55.37,124.21 180 top
R241  100  [0603]  68.58,123.57 270 top
R242  100  [0603]  70.23,123.57 270 top
R243  100  [0603]  71.88,123.57 270 top
R244  100  [0603]  73.53,123.57 270 top
R245  100  [0603]  75.18,123.57 270 top
R246  100  [0603]  76.84,123.57 270 top
R247  100  [0603]  78.49,123.57 270 top
R248  100  [0603]  80.14,123.57 270 top
R249  100  [0603]  84.45,128.91 270 top
R250  100  [0603]  84.91,137.19 315 top
R251  100  [0603]  84.58,135.38 135 top
R252  100  [0603]  82.8,124.21 180 top
R253  100  [0603]  96.01,123.57 270 top
R254  100  [0603]  97.66,123.57 270 top
R255  100  [0603]  99.31,123.57 270 top
R256  100  [0603]  100.97,123.57 270 top
R257  100  [0603]  102.62,123.57 270 top
R258  100  [0603]  104.27,123.57 270 top
R259  100  [0603]  105.92,123.57 270 top
R260  100  [0603]  107.57,123.57 270 top
R261  100  [0603]  111.89,128.91 270 top
R262  100  [0603]  112.34,137.19 315 top
R263  100  [0603]  112.01,135.38 135 top
R264  100  [0603]  110.24,124.21 180 top
R265  100  [0603]  123.44,123.57 270 top
R266  100  [0603]  125.09,123.57 270 top
R267  100  [0603]  126.75,123.57 270 top
R268  100  [0603]  128.4,123.57 270 top
R269  100  [0603]  130.05,123.57 270 top
R270  100  [0603]  131.7,123.57 270 top
R271  100  [0603]  133.35,123.57 270 top
R272  100  [0603]  135,123.57 270 top
R273  100  [0603]  139.32,128.91 270 top
R274  100  [0603]  139.78,137.19 315 top
R275  100  [0603]  139.45,135.38 135 top
R276  100  [0603]  137.67,124.21 180 top
R277  100  [0603]  150.88,123.57 270 top
R278  100  [0603]  152.53,123.57 270 top
R279  100  [0603]  154.18,123.57 270 top
R280  100  [0603]  155.83,123.57 270 top
R281  100  [0603]  157.48,123.57 270 top
R282  100  [0603]  159.13,123.57 270 top
R283  100  [0603]  160.78,123.57 270 top
R284  100  [0603]  162.43,123.57 270 top
R285  100  [0603]  166.75,128.91 270 top
R286  100  [0603]  167.21,137.19 315 top
R287  100  [0603]  166.88,135.38 135 top
R288  100  [0603]  165.1,124.21 180 top
TP1  TPTP20SQ  [TP20SQ]  28.45,26.42 0 bottom
TP2  TPTP20SQ  [TP20SQ]  28.45,23.88 0 bottom
TP3  TPTP20SQ  [TP20SQ]  28.45,21.34 0 bottom
TP4  TPTP20SQ  [TP20SQ]  28.45,18.8 0 bottom
TP5  TPTP20SQ  [TP20SQ]  28.45,28.96 180 bottom
TP6  TPTP20SQ  [TP20SQ]  55.88,26.42 0 bottom
TP7  TPTP20SQ  [TP20SQ]  55.88,23.88 0 bottom
TP8  TPTP20SQ  [TP20SQ]  55.88,21.34 0 bottom
TP9  TPTP20SQ  [TP20SQ]  55.88,18.8 0 bottom
TP10  TPTP20SQ  [TP20SQ]  55.88,28.96 180 bottom
TP11  TPTP20SQ  [TP20SQ]  83.31,26.42 0 bottom
TP12  TPTP20SQ  [TP20SQ]  83.31,23.88 0 bottom
TP13  TPTP20SQ  [TP20SQ]  83.31,21.34 0 bottom
TP14  TPTP20SQ  [TP20SQ]  83.31,18.8 0 bottom
TP15  TPTP20SQ  [TP20SQ]  83.31,28.96 180 bottom
TP16  TPTP20SQ  [TP20SQ]  110.74,26.42 0 bottom
TP17  TPTP20SQ  [TP20SQ]  110.74,23.88 0 bottom
TP18  TPTP20SQ  [TP20SQ]  110.74,21.34 0 bottom
TP19  TPTP20SQ  [TP20SQ]  110.74,18.8 0 bottom
TP20  TPTP20SQ  [TP20SQ]  110.74,28.96 180 bottom
TP21  TPTP20SQ  [TP20SQ]  138.18,26.42 0 bottom
TP22  TPTP20SQ  [TP20SQ]  138.18,23.88 0 bottom
TP23  TPTP20SQ  [TP20SQ]  138.18,21.34 0 bottom
TP24  TPTP20SQ  [TP20SQ]  138.18,18.8 0 bottom
TP25  TPTP20SQ  [TP20SQ]  138.18,28.96 180 bottom
TP26  TPTP20SQ  [TP20SQ]  165.61,26.42 0 bottom
TP27  TPTP20SQ  [TP20SQ]  165.61,23.88 0 bottom
TP28  TPTP20SQ  [TP20SQ]  165.61,21.34 0 bottom
TP29  TPTP20SQ  [TP20SQ]  165.61,18.8 0 bottom
TP30  TPTP20SQ  [TP20SQ]  165.61,28.96 180 bottom
TP31  TPTP20SQ  [TP20SQ]  28.45,61.85 0 bottom
TP32  TPTP20SQ  [TP20SQ]  28.45,59.31 0 bottom
TP33  TPTP20SQ  [TP20SQ]  28.45,56.77 0 bottom
TP34  TPTP20SQ  [TP20SQ]  28.45,54.23 0 bottom
TP35  TPTP20SQ  [TP20SQ]  28.45,64.39 180 bottom
TP36  TPTP20SQ  [TP20SQ]  55.88,61.85 0 bottom
TP37  TPTP20SQ  [TP20SQ]  55.88,59.31 0 bottom
TP38  TPTP20SQ  [TP20SQ]  55.88,56.77 0 bottom
TP39  TPTP20SQ  [TP20SQ]  55.88,54.23 0 bottom
TP40  TPTP20SQ  [TP20SQ]  55.88,64.39 180 bottom
TP41  TPTP20SQ  [TP20SQ]  83.31,61.85 0 bottom
TP42  TPTP20SQ  [TP20SQ]  83.31,59.31 0 bottom
TP43  TPTP20SQ  [TP20SQ]  83.31,56.77 0 bottom
TP44  TPTP20SQ  [TP20SQ]  83.31,54.23 0 bottom
TP45  TPTP20SQ  [TP20SQ]  83.31,64.39 180 bottom
TP46  TPTP20SQ  [TP20SQ]  110.74,61.85 0 bottom
TP47  TPTP20SQ  [TP20SQ]  110.74,59.31 0 bottom
TP48  TPTP20SQ  [TP20SQ]  110.74,56.77 0 bottom
TP49  TPTP20SQ  [TP20SQ]  110.74,54.23 0 bottom
TP50  TPTP20SQ  [TP20SQ]  110.74,64.39 180 bottom
TP51  TPTP20SQ  [TP20SQ]  138.18,61.85 0 bottom
TP52  TPTP20SQ  [TP20SQ]  138.18,59.31 0 bottom
TP53  TPTP20SQ  [TP20SQ]  138.18,56.77 0 bottom
TP54  TPTP20SQ  [TP20SQ]  138.18,54.23 0 bottom
TP55  TPTP20SQ  [TP20SQ]  138.18,64.39 180 bottom
TP56  TPTP20SQ  [TP20SQ]  165.61,61.85 0 bottom
TP57  TPTP20SQ  [TP20SQ]  165.61,59.31 0 bottom
TP58  TPTP20SQ  [TP20SQ]  165.61,56.77 0 bottom
TP59  TPTP20SQ  [TP20SQ]  165.61,54.23 0 bottom
TP60  TPTP20SQ  [TP20SQ]  165.61,64.39 180 bottom
TP61  TPTP20SQ  [TP20SQ]  28.45,97.28 0 bottom
TP62  TPTP20SQ  [TP20SQ]  28.45,94.74 0 bottom
TP63  TPTP20SQ  [TP20SQ]  28.45,92.2 0 bottom
TP64  TPTP20SQ  [TP20SQ]  28.45,89.66 0 bottom
TP65  TPTP20SQ  [TP20SQ]  28.45,99.82 180 bottom
TP66  TPTP20SQ  [TP20SQ]  55.88,97.28 0 bottom
TP67  TPTP20SQ  [TP20SQ]  55.88,94.74 0 bottom
TP68  TPTP20SQ  [TP20SQ]  55.88,92.2 0 bottom
TP69  TPTP20SQ  [TP20SQ]  55.88,89.66 0 bottom
TP70  TPTP20SQ  [TP20SQ]  55.88,99.82 180 bottom
TP71  TPTP20SQ  [TP20SQ]  83.31,97.28 0 bottom
TP72  TPTP20SQ  [TP20SQ]  83.31,94.74 0 bottom
TP73  TPTP20SQ  [TP20SQ]  83.31,92.2 0 bottom
TP74  TPTP20SQ  [TP20SQ]  83.31,89.66 0 bottom
TP75  TPTP20SQ  [TP20SQ]  83.31,99.82 180 bottom
TP76  TPTP20SQ  [TP20SQ]  110.74,97.28 0 bottom
TP77  TPTP20SQ  [TP20SQ]  110.74,94.74 0 bottom
TP78  TPTP20SQ  [TP20SQ]  110.74,92.2 0 bottom
TP79  TPTP20SQ  [TP20SQ]  110.74,89.66 0 bottom
TP80  TPTP20SQ  [TP20SQ]  110.74,99.82 180 bottom
TP81  TPTP20SQ  [TP20SQ]  138.18,97.28 0 bottom
TP82  TPTP20SQ  [TP20SQ]  138.18,94.74 0 bottom
TP83  TPTP20SQ  [TP20SQ]  138.18,92.2 0 bottom
TP84  TPTP20SQ  [TP20SQ]  138.18,89.66 0 bottom
TP85  TPTP20SQ  [TP20SQ]  138.18,99.82 180 bottom
TP86  TPTP20SQ  [TP20SQ]  165.61,97.28 0 bottom
TP87  TPTP20SQ  [TP20SQ]  165.61,94.74 0 bottom
TP88  TPTP20SQ  [TP20SQ]  165.61,92.2 0 bottom
TP89  TPTP20SQ  [TP20SQ]  165.61,89.66 0 bottom
TP90  TPTP20SQ  [TP20SQ]  165.61,99.82 180 bottom
TP91  TPTP20SQ  [TP20SQ]  28.45,132.72 0 bottom
TP92  TPTP20SQ  [TP20SQ]  28.45,130.17 0 bottom
TP93  TPTP20SQ  [TP20SQ]  28.45,127.64 0 bottom
TP94  TPTP20SQ  [TP20SQ]  28.45,125.09 0 bottom
TP95  TPTP20SQ  [TP20SQ]  28.45,135.25 180 bottom
TP96  TPTP20SQ  [TP20SQ]  55.88,132.72 0 bottom
TP97  TPTP20SQ  [TP20SQ]  55.88,130.17 0 bottom
TP98  TPTP20SQ  [TP20SQ]  55.88,127.64 0 bottom
TP99  TPTP20SQ  [TP20SQ]  55.88,125.09 0 bottom
TP100  TPTP20SQ  [TP20SQ]  55.88,135.25 180 bottom
TP101  TPTP20SQ  [TP20SQ]  83.31,132.72 0 bottom
TP102  TPTP20SQ  [TP20SQ]  83.31,130.17 0 bottom
TP103  TPTP20SQ  [TP20SQ]  83.31,127.64 0 bottom
TP104  TPTP20SQ  [TP20SQ]  83.31,125.09 0 bottom
TP105  TPTP20SQ  [TP20SQ]  83.31,135.25 180 bottom
TP106  TPTP20SQ  [TP20SQ]  110.74,132.72 0 bottom
TP107  TPTP20SQ  [TP20SQ]  110.74,130.17 0 bottom
TP108  TPTP20SQ  [TP20SQ]  110.74,127.64 0 bottom
TP109  TPTP20SQ  [TP20SQ]  110.74,125.09 0 bottom
TP110  TPTP20SQ  [TP20SQ]  110.74,135.25 180 bottom
TP111  TPTP20SQ  [TP20SQ]  138.18,132.72 0 bottom
TP112  TPTP20SQ  [TP20SQ]  138.18,130.17 0 bottom
TP113  TPTP20SQ  [TP20SQ]  138.18,127.64 0 bottom
TP114  TPTP20SQ  [TP20SQ]  138.18,125.09 0 bottom
TP115  TPTP20SQ  [TP20SQ]  138.18,135.25 180 bottom
TP116  TPTP20SQ  [TP20SQ]  165.61,132.72 0 bottom
TP117  TPTP20SQ  [TP20SQ]  165.61,130.17 0 bottom
TP118  TPTP20SQ  [TP20SQ]  165.61,127.64 0 bottom
TP119  TPTP20SQ  [TP20SQ]  165.61,125.09 0 bottom
TP120  TPTP20SQ  [TP20SQ]  165.61,135.25 180 bottom
U1  SN74HCT245PWR  [TSSOP20]  15.88,24.51 90 top
U2  AP2120N-3.3TRG1  [SOT95P237X112-3N]  19.05,30.73 0 top
U3  STM32L432KCU6  [QFN50P500X500X60-33N]  24.45,25.9 315 top
U4  SN74HCT245PWR  [TSSOP20]  43.31,24.51 90 top
U5  AP2120N-3.3TRG1  [SOT95P237X112-3N]  46.48,30.73 0 top
U6  STM32L432KCU6  [QFN50P500X500X60-33N]  51.88,25.9 315 top
U7  SN74HCT245PWR  [TSSOP20]  70.74,24.51 90 top
U8  AP2120N-3.3TRG1  [SOT95P237X112-3N]  73.91,30.73 0 top
U9  STM32L432KCU6  [QFN50P500X500X60-33N]  79.31,25.9 315 top
U10  SN74HCT245PWR  [TSSOP20]  98.17,24.51 90 top
U11  AP2120N-3.3TRG1  [SOT95P237X112-3N]  101.35,30.73 0 top
U12  STM32L432KCU6  [QFN50P500X500X60-33N]  106.75,25.9 315 top
U13  SN74HCT245PWR  [TSSOP20]  125.6,24.51 90 top
U14  AP2120N-3.3TRG1  [SOT95P237X112-3N]  128.78,30.73 0 top
U15  STM32L432KCU6  [QFN50P500X500X60-33N]  134.18,25.9 315 top
U16  SN74HCT245PWR  [TSSOP20]  153.03,24.51 90 top
U17  AP2120N-3.3TRG1  [SOT95P237X112-3N]  156.21,30.73 0 top
U18  STM32L432KCU6  [QFN50P500X500X60-33N]  161.61,25.9 315 top
U19  SN74HCT245PWR  [TSSOP20]  15.88,59.94 90 top
U20  AP2120N-3.3TRG1  [SOT95P237X112-3N]  19.05,66.17 0 top
U21  STM32L432KCU6  [QFN50P500X500X60-33N]  24.45,61.33 315 top
U22  SN74HCT245PWR  [TSSOP20]  43.31,59.94 90 top
U23  AP2120N-3.3TRG1  [SOT95P237X112-3N]  46.48,66.17 0 top
U24  STM32L432KCU6  [QFN50P500X500X60-33N]  51.88,61.33 315 top
U25  SN74HCT245PWR  [TSSOP20]  70.74,59.94 90 top
U26  AP2120N-3.3TRG1  [SOT95P237X112-3N]  73.91,66.17 0 top
U27  STM32L432KCU6  [QFN50P500X500X60-33N]  79.31,61.33 315 top
U28  SN74HCT245PWR  [TSSOP20]  98.17,59.94 90 top
U29  AP2120N-3.3TRG1  [SOT95P237X112-3N]  101.35,66.17 0 top
U30  STM32L432KCU6  [QFN50P500X500X60-33N]  106.75,61.33 315 top
U31  SN74HCT245PWR  [TSSOP20]  125.6,59.94 90 top
U32  AP2120N-3.3TRG1  [SOT95P237X112-3N]  128.78,66.17 0 top
U33  STM32L432KCU6  [QFN50P500X500X60-33N]  134.18,61.33 315 top
U34  SN74HCT245PWR  [TSSOP20]  153.03,59.94 90 top
U35  AP2120N-3.3TRG1  [SOT95P237X112-3N]  156.21,66.17 0 top
U36  STM32L432KCU6  [QFN50P500X500X60-33N]  161.61,61.33 315 top
U37  SN74HCT245PWR  [TSSOP20]  15.88,95.38 90 top
U38  AP2120N-3.3TRG1  [SOT95P237X112-3N]  19.05,101.6 0 top
U39  STM32L432KCU6  [QFN50P500X500X60-33N]  24.45,96.76 315 top
U40  SN74HCT245PWR  [TSSOP20]  43.31,95.38 90 top
U41  AP2120N-3.3TRG1  [SOT95P237X112-3N]  46.48,101.6 0 top
U42  STM32L432KCU6  [QFN50P500X500X60-33N]  51.88,96.76 315 top
U43  SN74HCT245PWR  [TSSOP20]  70.74,95.38 90 top
U44  AP2120N-3.3TRG1  [SOT95P237X112-3N]  73.91,101.6 0 top
U45  STM32L432KCU6  [QFN50P500X500X60-33N]  79.31,96.76 315 top
U46  SN74HCT245PWR  [TSSOP20]  98.17,95.38 90 top
U47  AP2120N-3.3TRG1  [SOT95P237X112-3N]  101.35,101.6 0 top
U48  STM32L432KCU6  [QFN50P500X500X60-33N]  106.75,96.76 315 top
U49  SN74HCT245PWR  [TSSOP20]  125.6,95.38 90 top
U50  AP2120N-3.3TRG1  [SOT95P237X112-3N]  128.78,101.6 0 top
U51  STM32L432KCU6  [QFN50P500X500X60-33N]  134.18,96.76 315 top
U52  SN74HCT245PWR  [TSSOP20]  153.03,95.38 90 top
U53  AP2120N-3.3TRG1  [SOT95P237X112-3N]  156.21,101.6 0 top
U54  STM32L432KCU6  [QFN50P500X500X60-33N]  161.61,96.76 315 top
U55  SN74HCT245PWR  [TSSOP20]  15.88,130.81 90 top
U56  AP2120N-3.3TRG1  [SOT95P237X112-3N]  19.05,137.03 0 top
U57  STM32L432KCU6  [QFN50P500X500X60-33N]  24.45,132.2 315 top
U58  SN74HCT245PWR  [TSSOP20]  43.31,130.81 90 top
U59  AP2120N-3.3TRG1  [SOT95P237X112-3N]  46.48,137.03 0 top
U60  STM32L432KCU6  [QFN50P500X500X60-33N]  51.88,132.2 315 top
U61  SN74HCT245PWR  [TSSOP20]  70.74,130.81 90 top
U62  AP2120N-3.3TRG1  [SOT95P237X112-3N]  73.91,137.03 0 top
U63  STM32L432KCU6  [QFN50P500X500X60-33N]  79.31,132.2 315 top
U64  SN74HCT245PWR  [TSSOP20]  98.17,130.81 90 top
U65  AP2120N-3.3TRG1  [SOT95P237X112-3N]  101.35,137.03 0 top
U66  STM32L432KCU6  [QFN50P500X500X60-33N]  106.75,132.2 315 top
U67  SN74HCT245PWR  [TSSOP20]  125.6,130.81 90 top
U68  AP2120N-3.3TRG1  [SOT95P237X112-3N]  128.78,137.03 0 top
U69  STM32L432KCU6  [QFN50P500X500X60-33N]  134.18,132.2 315 top
U70  SN74HCT245PWR  [TSSOP20]  153.03,130.81 90 top
U71  AP2120N-3.3TRG1  [SOT95P237X112-3N]  156.21,137.03 0 top
U72  STM32L432KCU6  [QFN50P500X500X60-33N]  161.61,132.2 315 top
U$1  [ELECTRO_MAGE_PCB4_PIXEL_2#PNG]  41.56,26.86 0 bottom
U$2  [ELECTRO_MAGE_PCB4_PIXEL_2#PNG]  14.13,26.86 0 bottom
U$3  [ELECTRO_MAGE_PCB4_PIXEL_2#PNG]  69,26.86 0 bottom
U$4  [ELECTRO_MAGE_PCB4_PIXEL_2#PNG]  96.43,26.86 0 bottom
U$5  [ELECTRO_MAGE_PCB4_PIXEL_2#PNG]  123.86,26.86 0 bottom
U$6  [ELECTRO_MAGE_PCB4_PIXEL_2#PNG]  151.29,26.86 0 bottom
U$7  [ELECTRO_MAGE_PCB4_PIXEL_2#PNG]  14.13,62.3 0 bottom
U$8  [ELECTRO_MAGE_PCB4_PIXEL_2#PNG]  41.56,62.3 0 bottom
U$9  [ELECTRO_MAGE_PCB4_PIXEL_2#PNG]  69,62.3 0 bottom
U$10  [ELECTRO_MAGE_PCB4_PIXEL_2#PNG]  96.43,62.3 0 bottom
U$11  [ELECTRO_MAGE_PCB4_PIXEL_2#PNG]  123.86,62.3 0 bottom
U$12  [ELECTRO_MAGE_PCB4_PIXEL_2#PNG]  151.29,62.3 0 bottom
U$13  [ELECTRO_MAGE_PCB4_PIXEL_2#PNG]  14.13,97.73 0 bottom
U$14  [ELECTRO_MAGE_PCB4_PIXEL_2#PNG]  41.56,97.73 0 bottom
U$15  [ELECTRO_MAGE_PCB4_PIXEL_2#PNG]  69,97.73 0 bottom
U$16  [ELECTRO_MAGE_PCB4_PIXEL_2#PNG]  96.43,97.73 0 bottom
U$17  [ELECTRO_MAGE_PCB4_PIXEL_2#PNG]  123.86,97.73 0 bottom
U$18  [ELECTRO_MAGE_PCB4_PIXEL_2#PNG]  151.29,97.73 0 bottom
U$19  [ELECTRO_MAGE_PCB4_PIXEL_2#PNG]  14.13,133.16 0 bottom
U$20  [ELECTRO_MAGE_PCB4_PIXEL_2#PNG]  41.56,133.16 0 bottom
U$21  [ELECTRO_MAGE_PCB4_PIXEL_2#PNG]  69,133.16 0 bottom
U$22  [ELECTRO_MAGE_PCB4_PIXEL_2#PNG]  96.43,133.16 0 bottom
U$23  [ELECTRO_MAGE_PCB4_PIXEL_2#PNG]  123.86,133.16 0 bottom
U$24  [ELECTRO_MAGE_PCB4_PIXEL_2#PNG]  151.29,133.16 0 bottom

## Library data of the parts
C1 C2 C5 C6 C8 C9 C11 C12 C14 C15 C17 C18 C20 C21 C23 C24 C26 C27 C29 C30 C32 C33 C35 C36 C38 C39 C41 C42 C44 C45 C47 C48 C50 C51 C53 C54 C56 C57 C59 C60 C62 C63 C65 C66 C68 C69 C71 C72 = SparkFun-Capacitors; PROD_ID: CAP-08280
C3 C4 C7 C10 C13 C16 C19 C22 C25 C28 C31 C34 C37 C40 C43 C46 C49 C52 C55 C58 C61 C64 C67 C70 = SparkFun-Capacitors; PROD_ID: CAP-00810
D1-D48 = SparkFun-LED
E$1-E$8 J2 J7 J13 J19 J25 J31 J37 J43 J49 J55 J61 J67 J73 J79 J85 J91 J97 J103 J109 J115 J121 J127 J133 J139 = bens
J1 J11 J17 J23 J29 J35 J41 J47 J53 J59 J65 J71 J77 J83 J89 J95 J101 J107 J113 J119 J125 J131 J137 J143 = SparkFun-Connectors; PROD_ID: CONN-08438
J3 J4 J8 J9 J14 J15 J20 J21 J26 J27 J32 J33 J38 J39 J44 J45 J50 J51 J56 J57 J62 J63 J68 J69 J74 J75 J80 J81 J86 J87 J92 J93 J98 J99 J104 J105 J110 J111 J116 J117 J122 J123 J128 J129 J134 J135 J140 J141 = bens; SF_SKU: PRT-08432
J5 J10 J16 J22 J28 J34 J40 J46 J52 J58 J64 J70 J76 J82 J88 J94 J100 J106 J112 J118 J124 J130 J136 J142 = SparkFun-Connectors; PROD_ID: CONN-09696
J6 J12 J18 J24 J30 J36 J42 J48 J54 J60 J66 J72 J78 J84 J90 J96 J102 J108 J114 J120 J126 J132 J138 J144 = SparkFun-Connectors
JP1-JP72 = SparkFun-Jumpers
R1-R288 = SparkFun-Resistors; PROD_ID: RES-07863
TP1-TP120 = testpad
U1 U4 U7 U10 U13 U16 U19 U22 U25 U28 U31 U34 U37 U40 U43 U46 U49 U52 U55 U58 U61 U64 U67 U70 = scanlime
U2 U5 U8 U11 U14 U17 U20 U23 U26 U29 U32 U35 U38 U41 U44 U47 U50 U53 U56 U59 U62 U65 U68 U71 = Microchip_By_element14_Batch_1; MPN: MCP1700T-3302E/TT; OC_FARNELL: 1296592; OC_NEWARK: 88H9817; PACKAGE: SOT23-3; SUPPLIER: Microchip
U3 U6 U9 U12 U15 U18 U21 U24 U27 U30 U33 U36 U39 U42 U45 U48 U51 U54 U57 U60 U63 U66 U69 U72 = STM32L432KCU6; AVAILABILITY: Good; DESCRIPTION: ARM® Cortex®-M4 STM32L4 Microcontroller IC 32-Bit 80MHz 256KB (256K x 8) FLASH 32-UFQFPN (5x5); MF: STMicroelectronics; MP: STM32L432KCU6; PACKAGE: UFQFN-32 STMicroelectronics; PRICE: None; PURCHASE-URL: https://pricing.snapeda.com/search/part/STM32L432KCU6/?ref=eda
U$1-U$24 = Electro_Mage_pcb4_pixel_6